# EAGLE board Rocket Club Drag Flaps2 (EAGLE 7.5.0)
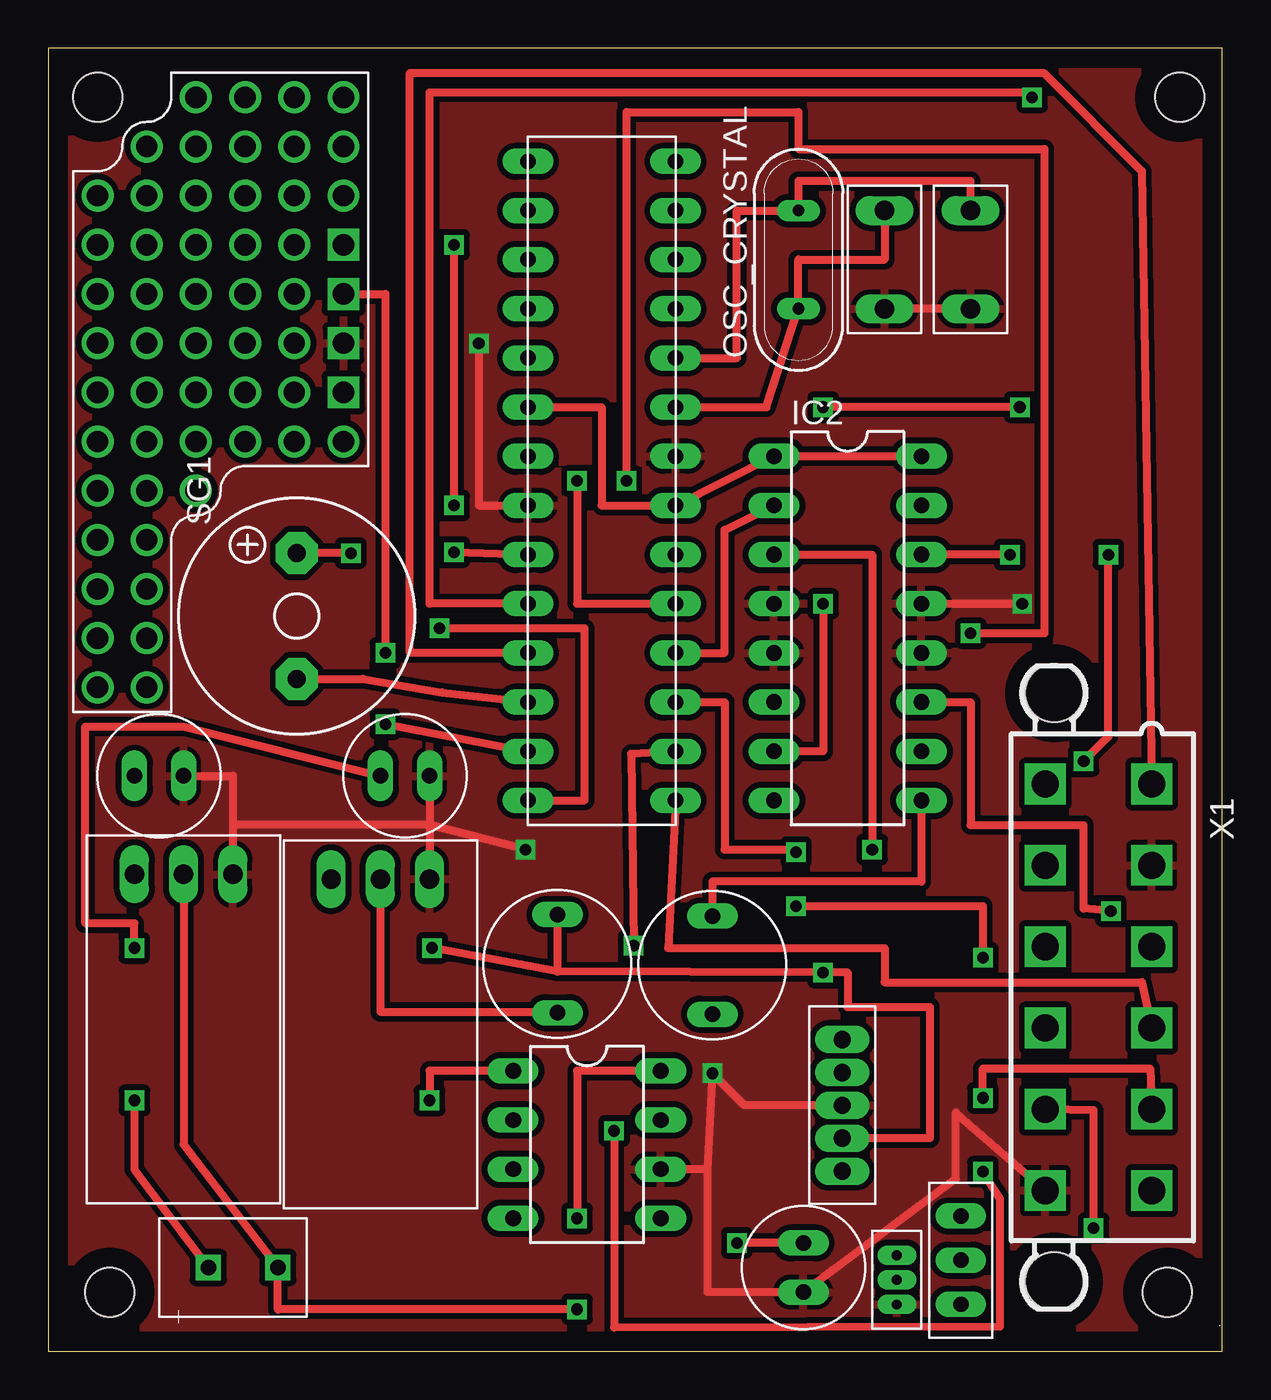
[diagram p0: board, top side]
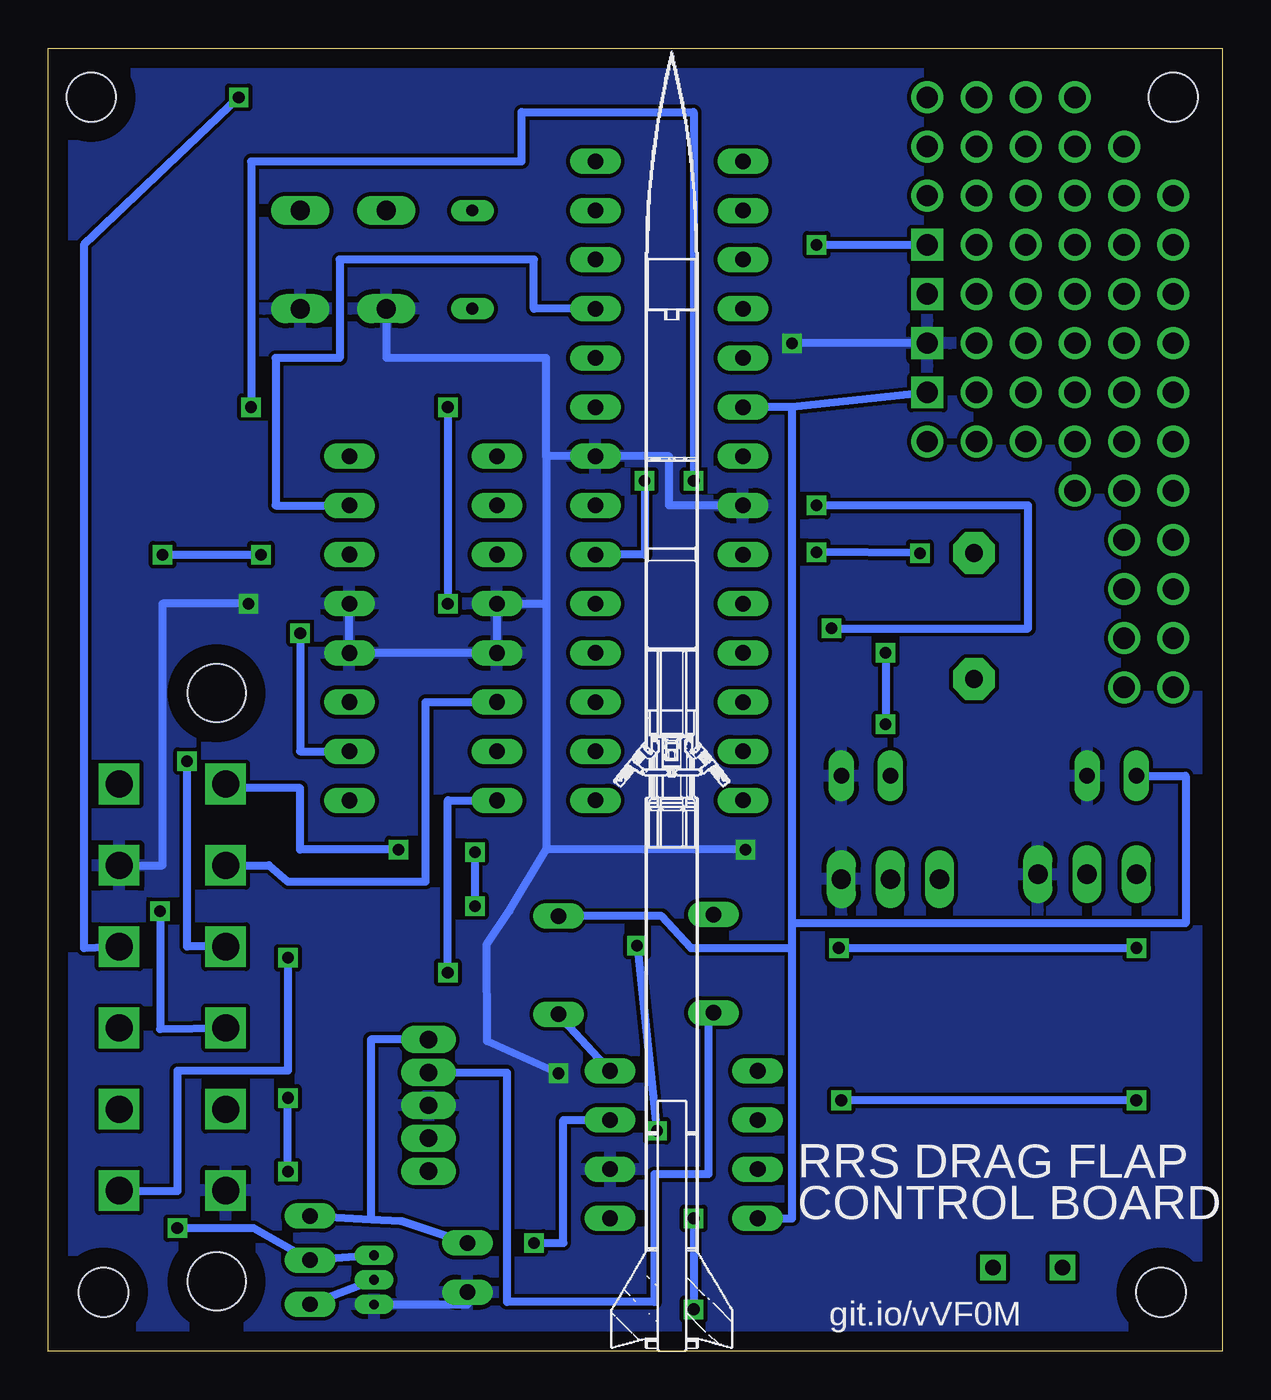
[diagram p1: board, bottom side, seen from below]

Size 60.63 x 67.3 mm. Coordinates in mm from the lower left corner, seen from the top.
Outline: 0,0 60.63,0 60.63,67.3 0,67.3 0,0
Copper layers (1*16): Top 0.035mm / dielectric 1.5mm / Bottom 0.035mm
Design rules "default": minimum track width 10mil, minimum drill 24mil, track to track 8mil, track to pad 8mil, pad to pad 8mil, via to via 8mil, smd to smd 8mil, copper to edge 40mil, drill to drill 8mil, minimum pad ring 10mil, minimum via ring 8mil, stop-mask expansion 4mil, vias tented up to drill 0mil, thermal gap 10mil
Holes 2.54 mm at 2.54,64.77 58.42,64.77 57.78,3.05 3.17,3.05

## Footprints (pad centres in the part's own frame; a part is rotated, then mirrored left to right if it is on the bottom)
BOOST_CAP = drill 0.8 square: P$1 0,0; P$2 0,-3.592
CATCH_DIODOE = drill 1 long: P$1 0,2.54; P$2 0,0; P$3 0,-2.54
DIL16 = drill 0.813 long: 1 -8.89,-3.81; 2 -6.35,-3.81; 3 -3.81,-3.81; 4 -1.27,-3.81; 5 1.27,-3.81; 6 3.81,-3.81; 7 6.35,-3.81; 8 8.89,-3.81; 9 8.89,3.81; 10 6.35,3.81; 11 3.81,3.81; 12 1.27,3.81; 13 -1.27,3.81; 14 -3.81,3.81; 15 -6.35,3.81; 16 -8.89,3.81
DIL08 = drill 0.813 long: 1 -3.81,-3.81; 2 -1.27,-3.81; 3 1.27,-3.81; 4 3.81,-3.81; 5 3.81,3.81; 6 1.27,3.81; 7 -1.27,3.81; 8 -3.81,3.81
QS = drill 0.61 long: 1 -2.54,0; 2 2.54,0
F/QMX = drill 0.914 pad 2.159 octagon: + 3.251,0; - -3.251,0
DARLINGTON = drill 0.8 long: BASE 2.28,0; COLLECTOR 0,0; EMITTER -2.28,0
AXIAL_2 = drill 0.8 long: P$1 -2.54,0; P$2 2.54,0
AXIAL_2_MINI = drill 1 long: P$1 -2.54,0; P$2 2.54,0
ATMEGA328 = drill 0.8 long: 0_RX 0,-2.54; 1_TX 0,-5.08; 2 0,-7.62; 3 0,-10.16; 4 0,-12.7; 5 0,-25.4; 6 0,-27.94; 7 0,-30.48; 8 0,-33.02; 9 7.62,-33.02; 10_SS 7.62,-30.48; 11_MOSI 7.62,-27.94; 12_MISO 7.62,-25.4; 13_SCK 7.62,-22.86; A0 7.62,-12.7; A1 7.62,-10.16; A2 7.62,-7.62; A3 7.62,-5.08; AREF 7.62,-17.78; GND 0,-17.78; GND_2 7.62,-15.24; OSC1 0,-20.32; OSC2 0,-22.86; RESET 0,0; SCL 7.62,0; SDA 7.62,-2.54; VCC 0,-15.24; VCC_2 7.62,-20.32
AXIAL_2_REAL = drill 0.8 long: P$1 -1.27,0; P$2 1.27,0
HALLSENSOR = drill 0.5 long: GROUND 1.27,0; OUTPUT 0,0; SUPPLY -1.27,0
LSM303DLHC/LSGD20H/BMP180 = drill 1.1 square: GGG -1.27,-7.62; SCLSCL 3.81,-7.62; SDASDA 1.27,-7.62; VVV -3.81,-7.62 | drill 1.1: GINT 1.27,-5.08; GND -6.35,-5.08; GRDY 3.81,-5.08; LIN1 6.35,-5.08; LIN2 8.89,-5.08; LRDY 11.43,-5.08; P$1 -13.97,5.08; P$2 -16.51,5.08; P$3 -6.35,-2.54; P$4 -3.81,-2.54; P$5 -1.27,-2.54; P$6 1.27,-2.54; P$7 3.81,-2.54; P$8 6.35,-2.54; P$9 8.89,-2.54; P$10 11.43,-2.54; P$11 11.43,0; P$12 8.89,0; P$13 -6.35,-7.62; P$14 8.89,2.54; P$15 6.35,-7.62; P$16 8.89,-7.62; P$17 6.35,5.08; P$18 6.35,2.54; P$19 6.35,0; P$20 3.81,0; P$21 3.81,2.54; P$22 3.81,5.08; P$23 1.27,5.08; P$24 1.27,2.54; P$25 1.27,0; P$26 -1.27,0; P$27 -1.27,2.54; P$28 -3.81,0; P$29 -6.35,0; P$30 -3.81,2.54; P$31 -1.27,5.08; P$32 -3.81,5.08; P$33 -6.35,2.54; P$34 -8.89,0; P$35 -16.51,2.54; P$36 -8.89,2.54; P$37 -6.35,5.08; P$38 -8.89,5.08; P$39 -11.43,5.08; P$40 -11.43,2.54; P$41 -13.97,2.54; P$42 -19.05,5.08; P$43 -19.05,2.54; P$44 11.43,-7.62; SCL -3.81,-5.08; SDA -1.27,-5.08
NEWREGULATOR = drill 0.9 long: FEEDBACK 1.7,0; GROUND 3.4,0; ON/OFF 0,0; OUTPUT 5.1,0; VIN 6.8,0
5566-12 = drill 1.4 square: 1 10.5,-2.75; 2 6.3,-2.75; 3 2.1,-2.75; 4 -2.1,-2.75; 5 -6.3,-2.75; 6 -10.5,-2.75; 7 10.5,2.75; 8 6.3,2.75; 9 2.1,2.75; 10 -2.1,2.75; 11 -6.3,2.75; 12 -10.5,2.75 | hole 3: 15.2,2.29; -15.2,2.29

## Placement (x,y rotation side)
BOOST_CAP_1  10nF  [BOOST_CAP]  8.26,4.32 90 top
CATCH_DIODE_1  CATCH_DIODE  [CATCH_DIODOE]  6.99,24.64 90 top
CATCH_DIODE_2  CATCH_DIODE  [CATCH_DIODOE]  17.14,24.38 90 top
IC2  [DIL16]  41.27,37.34 270 top
IC4  [DIL08]  27.81,10.67 270 top
OSC_CRYSTAL  16MHz  [QS]  38.73,56.39 90 top
SG1  F/QMX  [F/QMX]  12.83,37.97 90 top
U$1  DARLINGTON  [DARLINGTON]  47.12,4.7 270 top
U$2  AXIAL_3  [AXIAL_2]  34.29,19.94 270 top
U$3  AXIAL_2_MINI  [AXIAL_2_MINI]  47.62,56.39 270 top
U$4  ATMEGA328  [ATMEGA328]  32.38,28.45 180 top
U$5  AXIAL_2  [AXIAL_2_REAL]  5.71,29.72 0 top
U$6  AXIAL_2  [AXIAL_2_REAL]  18.41,29.72 0 top
U$7  AXIAL_3  [AXIAL_2]  26.29,20.02 270 top
U$8  AXIAL_2_MINI  [AXIAL_2_MINI]  43.18,56.39 270 top
U$9  HALL  [HALLSENSOR]  43.81,3.68 270 top
U$10  LSM303DLHC/LSGD20H/BMP180  [LSM303DLHC/LSGD20H/BMP180]  7.62,53.34 90 top
U$11  NEWREGULATOR  [NEWREGULATOR]  41,9.3 90 top
VIN_CAP1  330 uF  [AXIAL_2_REAL]  38.99,4.32 90 top
X1  5566-12  [5566-12]  54.23,18.8 90 top

## Library data of the parts
BOOST_CAP_1 CATCH_DIODE_1 CATCH_DIODE_2 U$1-U$11 VIN_CAP1 = ROCKET CLUB
IC2 IC4 = ic-package
OSC_CRYSTAL = special
SG1 = buzzer; OC_FARNELL: unknown; OC_NEWARK: unknown
X1 = con-molex; OC_FARNELL: unknown; OC_NEWARK: unknown

## Nets
GND: CATCH_DIODE_1.P$3 CATCH_DIODE_2.P$3 IC2.4 IC2.5 IC2.12 IC2.13 IC4.6 U$3.P$2 U$4.GND U$4.GND_2 U$5.P$2 U$6.P$2 U$8.P$2 U$9.GROUND U$10.GGG U$11.GROUND VIN_CAP1.P$1 X1.2 X1.12
N$1: U$4.RESET X1.4
N$2: U$4.0_RX X1.5
N$3: OSC_CRYSTAL.2 U$3.P$1 U$4.OSC2
N$4: OSC_CRYSTAL.1 U$4.OSC1 U$8.P$1
N$5: IC2.1 IC2.9 IC2.16 IC4.4 U$2.P$1 U$4.VCC U$4.VCC_2 U$5.P$1 U$10.VVV
N$6: CATCH_DIODE_2.P$2 U$7.P$2 U$11.OUTPUT
N$7: IC2.2 U$4.2
N$8: IC2.7 U$4.3
N$9: BOOST_CAP_1.P$2 CATCH_DIODE_1.P$2 IC4.8 U$2.P$2
N$10: BOOST_CAP_1.P$1 IC4.1
N$11: IC4.7 U$1.EMITTER U$11.VIN VIN_CAP1.P$2
N$12: U$4.A2 X1.1
N$13: IC2.8 U$6.P$1 U$7.P$1 U$11.FEEDBACK
N$15: IC2.10 U$4.4
N$16: IC2.15 U$4.5
N$17: U$4.1_TX X1.6
N$18: IC2.11 X1.10
N$19: IC2.14 X1.9
N$20: IC2.6 X1.8
N$21: IC2.3 X1.7
N$22: U$4.A1 X1.3
N$23: SG1.- U$4.A3
N$24: SG1.+ U$4.A0
N$25: U$1.COLLECTOR U$9.SUPPLY X1.11
N$26: U$4.SDA U$10.SDASDA
N$27: U$1.BASE U$9.OUTPUT
N$28: U$4.SCL U$10.SCLSCL

## Tracks (layer width: path | path; a pad name or v marks a point on that pad's centre or on a via)
GND  (via drill 0.6, 0.6 pad 0.81)
  Top 0.406: 34.04,9.4 v34.29,14.35 35.95,12.7 U$11.GROUND | 34.04,9.4 IC4.6 | 34.04,9.4 34.04,3.05 VIN_CAP1.P$1 46.86,8.89 46.86,12.32 X1.12 | U$3.P$2 U$8.P$2 | U$5.P$2 9.53,29.72 9.53,27.18 | 9.53,27.18 CATCH_DIODE_1.P$3 | 19.68,27.18 CATCH_DIODE_2.P$3 | U$6.P$2 19.68,27.18 | 19.68,27.18 9.53,27.18 | v24.64,25.91 19.68,27.18 | IC2.13 v50.29,38.61 | v22.23,52.07 22.23,43.69 U$4.GND_2
  Bottom 0.406: 34.92,46.23 U$4.GND 28.57,46.23 28.57,43.69 U$4.GND_2 | 34.92,46.23 34.92,38.61 | 34.92,38.61 34.92,25.91 | 34.92,46.23 34.92,51.31 43.18,51.31 U$8.P$2 | 34.92,38.61 IC2.4 IC2.5 IC2.12 IC2.13 | v24.64,25.91 34.92,25.91 | v34.29,14.35 37.97,16 38,21.01 36.83,22.73 34.92,25.91 | X1.2 54.74,25.1 54.74,38.61 v50.29,38.61 | U$9.GROUND 38.99,2.41 VIN_CAP1.P$1 | U$10.GGG v22.23,52.07
  pour Top (isolate 0.305): 0,0 0,67.31 60.96,67.31 60.96,0
  pour Bottom: 0,0 0,67.31 60.96,67.31 60.96,0
N$1
  Top 0.406: U$4.RESET 32,20.83 43.18,20.83 43.18,19.05 56.47,19.05 X1.4
N$2  (via drill 0.6 pad 0.81)
  Top 0.406: U$4.0_RX 30.1,30.86 v30.23,20.95 | v29.21,11.38 29.21,1.22 49.15,1.27 49.15,7.87 v48.26,9.27 | v48.26,13.08 48.26,14.61 56.9,14.61 X1.5
  Bottom 0.406: v30.23,20.95 v29.21,11.38 | v48.26,9.27 v48.26,13.08
N$3
  Top 0.406: U$4.OSC2 35.56,51.31 35.56,58.93 OSC_CRYSTAL.2 38.73,60.45 47.62,60.45 U$3.P$1
N$4
  Top 0.406: U$4.OSC1 37.08,48.77 OSC_CRYSTAL.1 38.73,56.39 43.18,56.39 U$8.P$1
N$5
  Top 0.406: IC2.16 IC2.1 U$4.VCC 28.57,43.69 28.57,48.77 U$4.VCC_2 | IC2.9 45.09,24.26 34.29,24.26 U$2.P$1
  Bottom 0.406: IC4.4 22.23,6.86 22.23,20.83 | 22.23,20.83 22.23,22.1 | 22.23,22.1 22.23,48.77 | 22.23,48.77 U$4.VCC_2 | U$5.P$1 1.91,29.72 1.91,22.1 22.23,22.1 | 22.23,20.83 27.43,20.83 28.96,22.48 U$2.P$1 | U$10.VVV 22.23,48.77
N$6
  Top 0.406: CATCH_DIODE_2.P$2 17.14,17.53 26.29,17.53 U$7.P$2
  Bottom 0.406: U$11.OUTPUT 36.96,14.4 36.96,2.54 29.34,2.54 29.34,9.14 26.54,9.14 26.54,17.22 U$7.P$2
N$7
  Top 0.406: U$4.2 34.92,36.07 34.92,42.42 IC2.2
N$8  (via drill 0.6)
  Top 0.406: v50.16,48.77 v40.01,48.77 | v40.01,38.61 40.01,30.99 IC2.7 | v27.3,44.96 27.3,38.61 U$4.3
  Bottom 0.406: v50.16,48.77 50.16,61.47 36.2,61.47 36.2,64.01 27.3,64.01 v27.3,44.96 | v40.01,48.77 v40.01,38.61
N$9  (via drill 0.6)
  Top 0.406: CATCH_DIODE_1.P$2 6.99,10.67 BOOST_CAP_1.P$2 11.85,2.16 v27.3,2.16 | IC4.8 27.3,14.48 v27.3,6.86
  Bottom 0.406: v27.3,6.86 v27.3,2.16 | IC4.8 U$2.P$2
N$10  (via drill 0.61)
  Top 0.406: IC4.1 19.68,14.48 v19.68,12.95 | v4.45,12.95 4.45,9.4 BOOST_CAP_1.P$1
  Bottom 0.406: v4.45,12.95 v19.68,12.95
N$11  (via drill 0.6)
  Top 0.406: VIN_CAP1.P$2 v35.56,5.59
  Bottom 0.406: v35.56,5.59 34.04,5.59 34.04,11.94 IC4.7 | VIN_CAP1.P$2 42.42,6.73 43.97,6.81 | U$1.EMITTER 43.97,6.81 | U$11.VIN 43.97,16.1 43.97,6.81
N$12
  Top 0.406: U$4.A2 18.67,36.07 18.67,66.04 51.39,66.04 56.47,60.96 X1.1
N$13  (via drill 0.6)
  Top 0.406: 26.29,19.61 v40.01,19.56 41.27,19.56 41.27,17.78 45.52,17.78 45.52,11 U$11.FEEDBACK | U$7.P$1 26.29,19.61 | 26.29,19.61 v19.81,20.83 | v4.45,20.83 4.45,22.1 1.91,22.1 1.91,32.26 6.99,32.26 U$6.P$1
  Bottom 0.406: v40.01,19.56 40.01,28.45 IC2.8 | v19.81,20.83 v4.45,20.83
N$15  (via drill 0.6)
  Top 0.406: v47.62,37.08 51.44,37.08 51.44,62.1 38.73,62.1 38.73,64.01 29.84,64.01 v29.84,44.96
  Bottom 0.406: v47.62,37.08 47.62,30.99 IC2.10 | v29.84,44.96 29.84,41.15 U$4.4
N$16
  Bottom 0.406: U$4.5 35.56,53.85 35.56,56.39 45.59,56.39 45.59,51.31 48.9,51.31 48.9,43.69 IC2.15
N$17  (via drill 0.6)
  Top 0.406: U$4.1_TX 34.92,33.53 34.92,25.91 38.61,25.91 v38.61,25.78 | v38.61,22.99 48.26,22.99 v48.26,20.32
  Bottom 0.406: v38.61,25.78 v38.61,22.99 | v48.26,20.32 48.26,14.48 53.98,14.48 53.98,8.26 56.47,8.26 X1.6
N$18  (via drill 0.6)
  Top 0.406: v54.86,22.73 53.47,22.86 53.47,27.18 47.62,27.18 47.62,33.53 IC2.11
  Bottom 0.406: v54.86,22.73 54.86,16.64 X1.10
N$19  (via drill 0.6)
  Top 0.406: v49.66,41.15 IC2.14 | v53.47,30.48 54.74,31.75 v54.74,41.15
  Bottom 0.406: X1.9 53.47,20.9 v53.47,30.48 | v54.74,41.15 v49.66,41.15
N$20
  Bottom 0.406: X1.8 49.23,25.1 48.26,24.26 41.15,24.26 41.15,33.53 IC2.6
N$21  (via drill 0.6)
  Top 0.406: IC2.3 42.55,41.15 v42.55,25.91
  Bottom 0.406: v42.55,25.91 47.62,25.91 47.62,29.08 50.97,29.08 X1.7
N$22  (via drill 0.6)
  Top 0.406: U$4.A1 19.68,38.61 19.68,65.02 50.55,65.02 v50.8,64.77
  Bottom 0.406: v50.8,64.77 58.8,57.15 58.8,20.83 X1.3
N$23
  Top 0.406: SG1.- 16.26,34.72 20.32,34.04 U$4.A3
N$24  (via drill 0.6, 0.6 pad 0.81)
  Top 0.406: v20.95,41.27 U$4.A0 | v15.62,41.22 SG1.+
  Bottom 0.406: v15.62,41.22 v20.95,41.27
N$25  (via drill 0.6)
  Top 0.406: v53.98,6.35 53.98,12.45 X1.11
  Bottom 0.406: U$9.SUPPLY U$1.COLLECTOR 50.04,6.35 v53.98,6.35
N$26  (via drill 0.6 pad 0.81)
  Top 0.406: U$10.SDASDA 17.4,54.61 v17.4,36.07 | v17.4,32.38 U$4.SDA
  Bottom 0.406: v17.4,36.07 v17.4,32.38
N$27
  Bottom 0.406: U$9.OUTPUT U$1.BASE
N$28  (via drill 0.6 pad 0.81)
  Top 0.406: U$4.SCL 27.69,28.45 27.69,37.34 v20.19,37.34 | v20.95,43.69 v20.95,57.15
  Bottom 0.406: v20.19,37.34 10.03,37.34 10.03,43.69 v20.95,43.69 | v20.95,57.15 U$10.SCLSCL

## Text on the board
bPlace: RRS DRAG FLAP / CONTROL BOARD | git.io/vVF0M